# Altium PCB LMR50410.PcbDoc
Units mil, origin at the board's own origin, x right, y up, seen from the top; angles counter-clockwise.
Board outline 850 x 550 mil, 2 copper layers (Top Layer, Bottom Layer); 10 components, 6 nets, 24 pads, 0 vias.
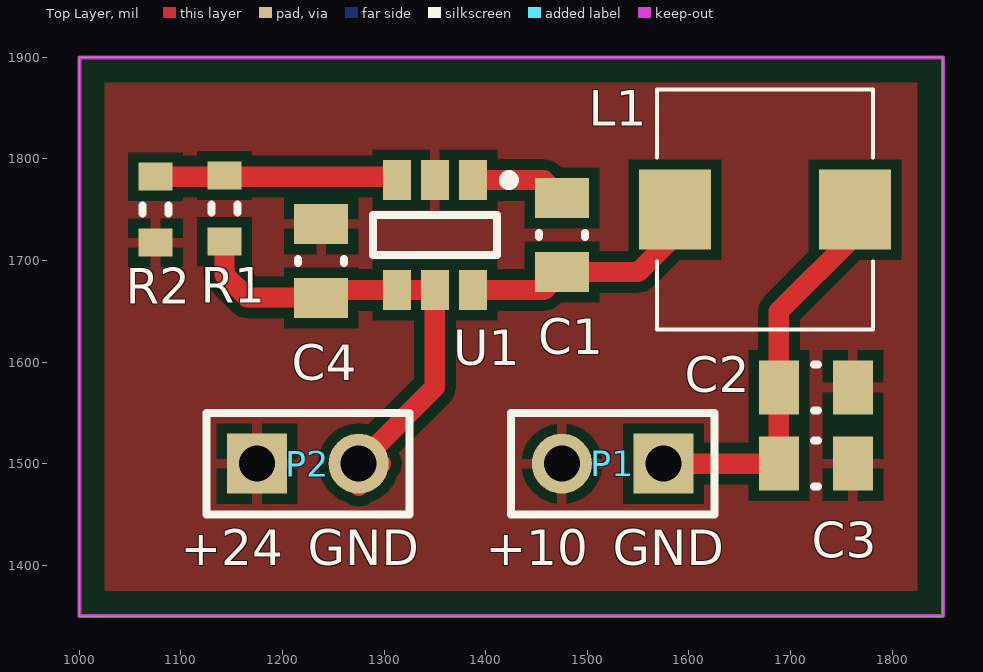
[diagram p0: Top Layer view]
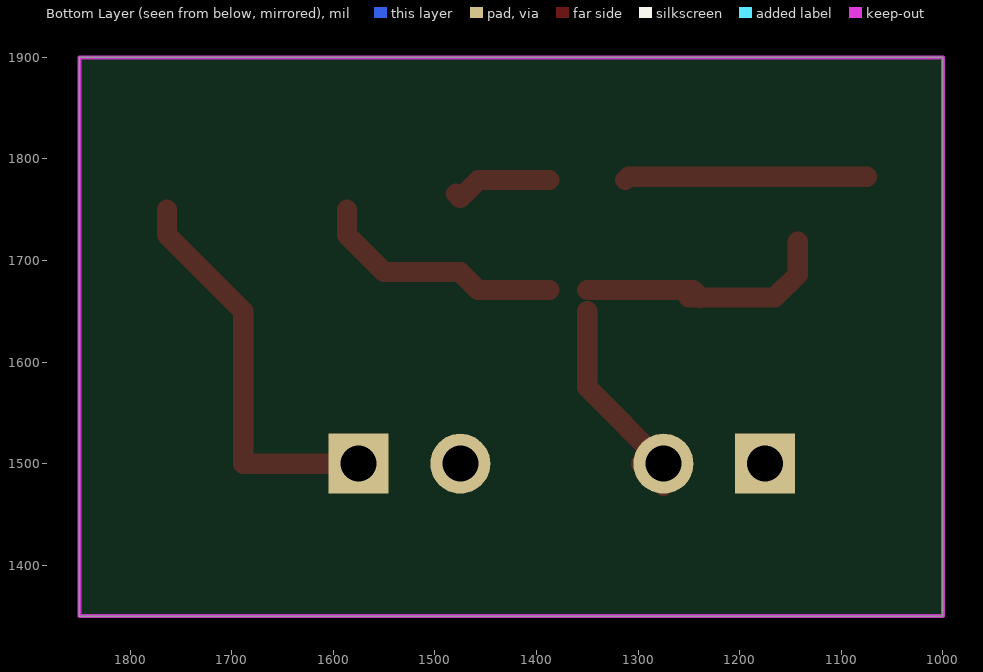
[diagram p1: Bottom Layer view, seen from below]
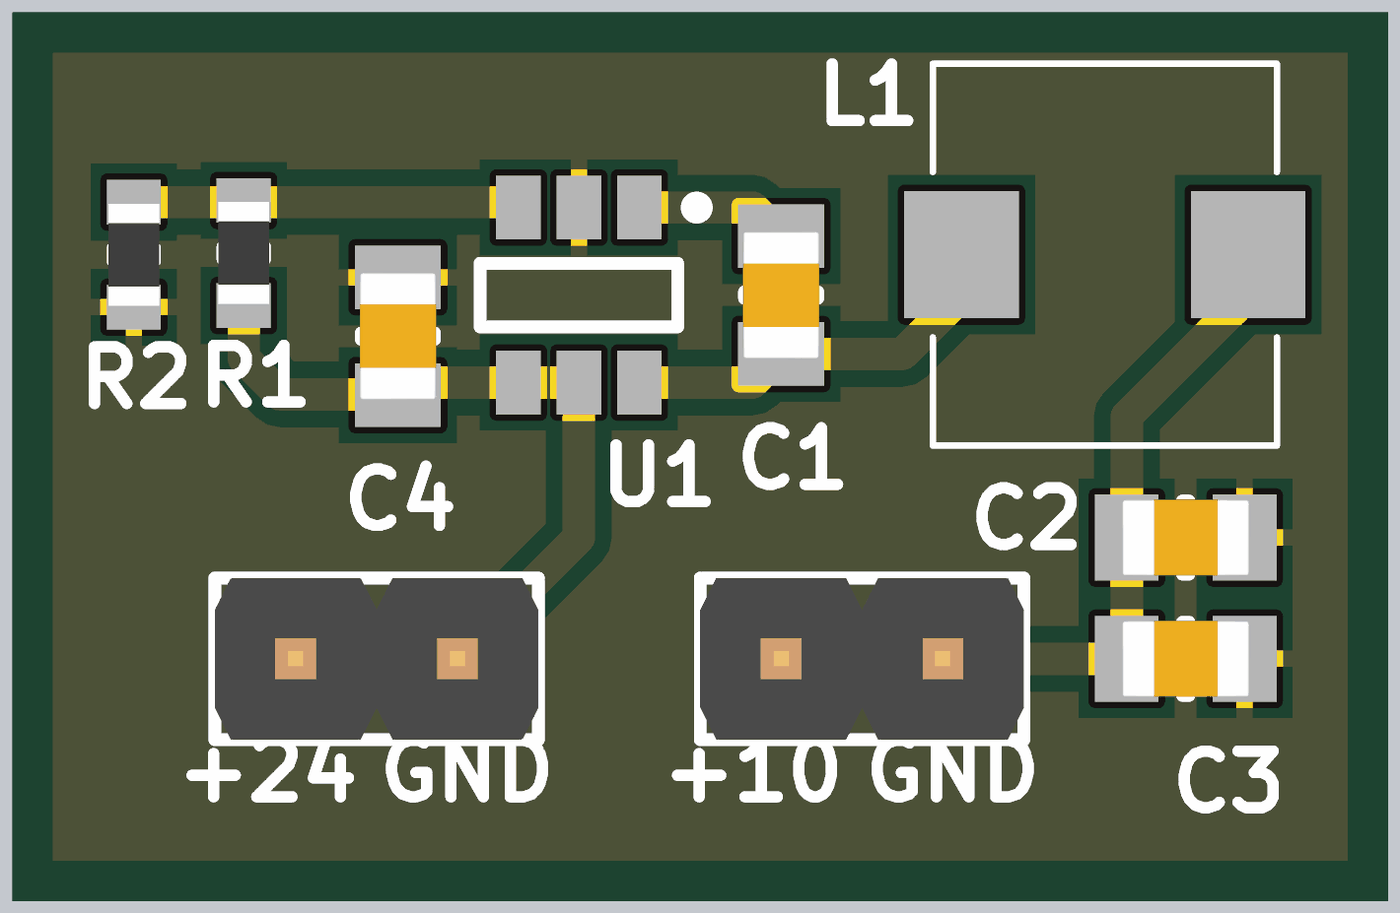
[diagram p2: 3D render of the assembled board from above, using the file's embedded part models]

## Layer stack, top to bottom
Top Solder: solder mask 0.4, Solder Resist, Dk 3.5
Top Layer: signal copper 1.4
Dielectric 1: dielectric 12.6, FR-4, Dk 4.8
Bottom Layer: signal copper 1.4
Bottom Solder: solder mask 0.4, Solder Resist, Dk 3.5

## Board outline
1000,1350 1850,1350 1850,1900 1000,1900

## Design rules (kind name [scope] priority, off if disabled: settings)
Clearance [All] p1: gap=10 ignorepadtopadclearanceinfootprint=TRUE except(0: Arc-Hole Track-Hole SMDPad-Hole THPad-Hole Via-Hole Fill-Hole Poly-Hole Region-Hole Text-Hole)
PolygonConnect [All] p1: connectstyle=Relief reliefconductorwidth=10 reliefentries=4 polygonreliefangle="90 Angle" airgapwidth=10
RoutingVias [All] p1: holewidth=28 width=50 viastyle="Through Hole" minholewidth=28 minwidth=50 maxholewidth=28 maxwidth=50
SolderMaskExpansion [All] p1: expansion=4 istentingtop=FALSE
Width [All] p1: maxlimit=40 minlimit=10 preferedwidth=10 minimp=50.000000 maximp=50.000000 favimp=50.000000
30 further rules are at their usual default settings.

## Components (designator, comment, footprint, x,y, rotation, side; value= is the part's Value field where it differs from the comment)
C1 "Capacitor - Nonpolarized" "0805 - Capacitor" 1475,1725 r90 top value="0.47 uF"
C2 "Capacitor - Nonpolarized" "0805 - Capacitor" 1725,1575 r180 top value=10uF
C3 "Capacitor - Nonpolarized" "0805 - Capacitor" 1725,1500 r180 top value="22 uF"
C4 "Capacitor - Nonpolarized" "0805 - Capacitor" 1238.16,1699.57 r270 top value="2.2 uF"
L1 "Inductor" "PA4340 - Inductor" 1675,1750 r0 top value="10 uH"
P1 "1x2 Header" HDR1X2 1575,1500 r180 top
P2 "1x2 Header" HDR1X2 1175,1500 r0 top
R1 "Resistor" "0603 - Resistor" 1142.88,1751 r90 top value="11 k"
R2 "Resistor" "0603 - Resistor" 1075,1750 r90 top value="100 k"
U1 "LMR50410" LMR50410 1350,1725 r270 top

## Footprints (in the part's own frame and the unit in brackets; to place one, negate y for a bottom-side part, rotate by r counter-clockwise, add the part's x,y. Pads: shape width x height; smd on the part's side, far side on the other; paste and mask are expansions set on the pad)
"0603 - Resistor" [mm] "0201 Chip Resistor - IPC Medium Density"
  rect 0.7x0.85 smd: 1(-0.825,0) 2(0.825,0)
  silkscreen extent -0.1,-0.33 0.1,0.33, body extent -0.8,-0.4 0.8,0.4, height 0.45
"0805 - Capacitor" [mm] "0805 Chip Capacitor - IPC Medium Density"
  rect 1x1.35 smd: 1(-0.925,0) 2(0.925,0)
  silkscreen extent -0.05,-0.58 0.05,0.58, body extent -1,-0.6 1,0.6, height 1.2
HDR1X2 [mm] "Connector; Header; 2 Position"
  rect 1.5x1.5 hole 0.9: 1(0,0)
  round 1.5 hole 0.9: 2(2.54,0)
  silkscreen extent -1.27,-1.27 3.81,1.27, body extent -1.27,-1.27 3.81,1.27, height 8.54
LMR50410 [mm] "SOT23, 6-Leads, Body 2.90x2.80mm, Pitch 0.95mm, IPC Medium Density"
  rect 1x0.7 smd: 1(-1.375,0.95) 2(-1.375,0) 3(-1.375,-0.95) 4(1.375,-0.95) 5(1.375,0) 6(1.375,0.95)
  silkscreen extent -1.5,-1.55 0.5,1.98, body extent -0.88,-1.52 0.87,1.53, height 1.1
"PA4340 - Inductor" [mm]
  rect 1.8x2 smd: 1(-2.25,0) 2(2.25,0)
  silkscreen extent -2.7,-3 2.7,3

## Part data
C1 C2 C3 C4: "Nonpolarized Capacitor", Manufacturer=Yageo, Manufacturer Part Number=CC0805KKX5R8BB106, Supplier Part Number=311-1869-1-ND
L1: Manufacturer=Pulse, Manufacturer Part Number=PA4340.103NLT, Supplier Part Number=553-2987-1-ND
P1 P2: "1x2 Pin Header"
R1: Manufacturer=ROHM, Manufacturer Part Number=ESR03EZPJ113, Supplier Part Number=RHM11KDCT-ND
R2: Manufacturer=ROHM, Manufacturer Part Number=ESR03EZPJ104, Supplier Part Number=RHM100KDCT-ND
U1: "4V to 36V 1A, Buck Converter", Digikey Part Number=296-LMR50410YQDBVRQ1CT-ND, Manufacturer="Texas Instruments", Manufacturer Part Number=LMR50410YQDBVRQ1, Datasheet=https://www.ti.com/lit/ds/symlink/lmr50410-q1.pdf

## Nets (pads, with @x,y where several pads share a name; then routed paths per layer and width w, separated by ;. In a path a pad name is that pad's centre, name@x,y a point inside that pad or via, vN(x,y) a via of type N, cw(c..) or ccw(c..) an arc to the next point about the centre after c; other vN are vias at no path point)
+10: C2.2 C3.2 L1.2 P1.1 | length 394.6
  Top Layer w20: P1.1 C3.2 C2.2 1688.58,1650 1763.58,1725 L1.2
+24: C4.2 P2.2 R1.1 U1.4 U1.5 | length 475.9
  Top Layer w20: R1.1 1142.88,1686.04 1165.34,1663.58 C4.2@1250,1663.58 ; C4.2 1245.88,1670.87 U1.4 U1.5 ; P2.2@1275,1478.15 P2.2@1296.85,1500 ; P2.2 1350,1575 1350,1650
GND: C2.1 C3.1 C4.1 P1.2 P2.1 R2.1 U1.2
NetC1_1: C1.1 L1.1 U1.6 | length 246.4
  Top Layer w20: U1.6 1457.28,1670.87 C1.1 1550,1688.58 1586.42,1725 L1.1
NetC1_2: C1.2 U1.1 | length 100.8
  Top Layer w20: U1.1 1457.28,1779.13 C1.2 C1.2@1479.13,1765.55
NetR1_2: R1.2 R2.2 U1.3 | length 239
  Top Layer w20: R2.2 1309.25,1782.48 U1.3

## Polygon pours and split planes (outlines as drawn)
GND on Top Layer "GND_L01_P000" (solid, remove dead copper, pour order 0): 1025,1875 1825,1875 1825,1375 1025,1375

## Keep-outs
Keep-Out Layer:
  the board outline again, w3.94

## Silkscreen, mask and mechanical layers (free items; w line width, h text height)
Top Overlay:
  text "+24" at 1100,1400 h35
  text "GND" at 1225,1400 h35
  text "+10" at 1400,1400 h35
  text "GND" at 1525,1400 h35